# EAGLE board PCB (EAGLE 9.7.0)
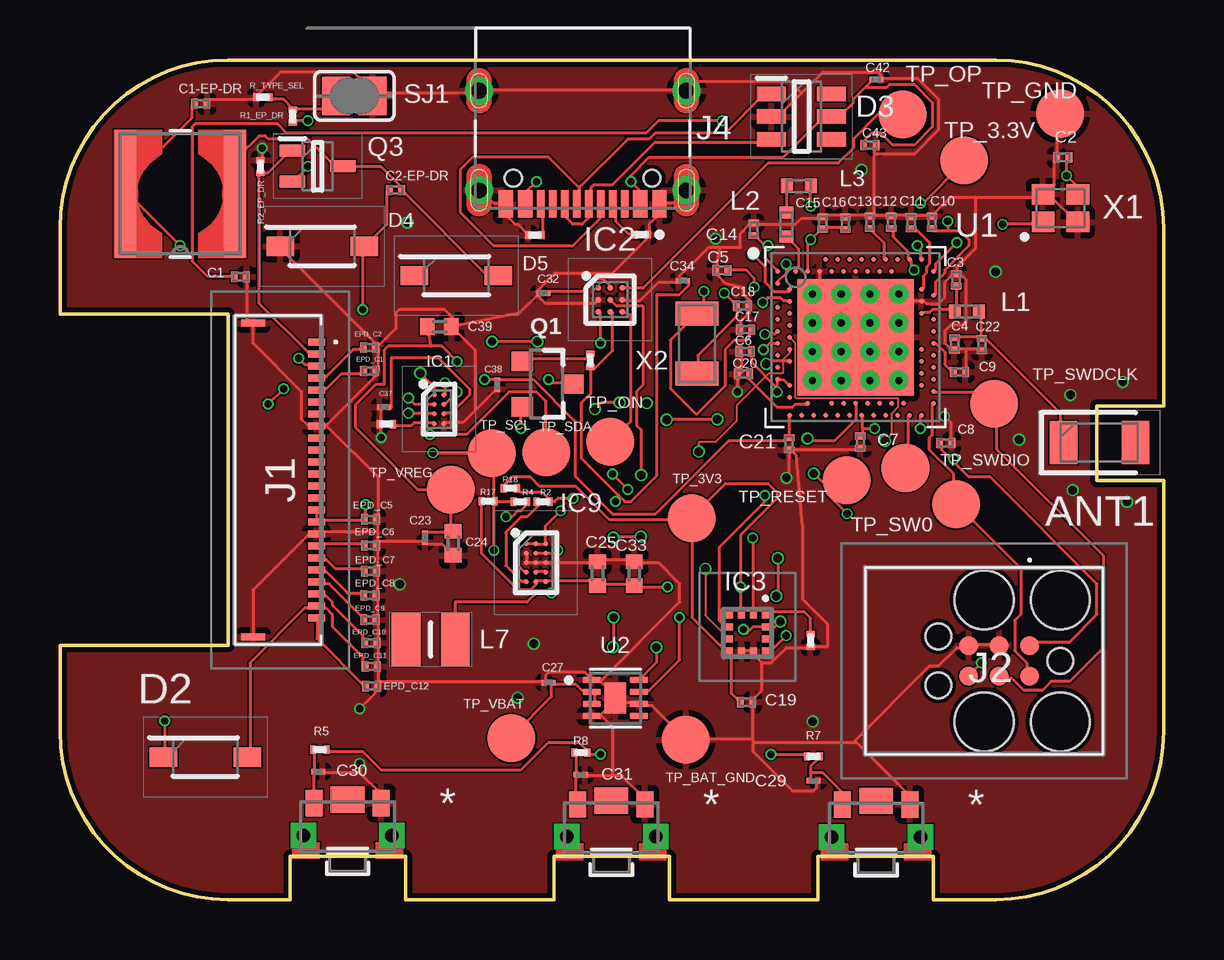
[diagram p0: board, top side]
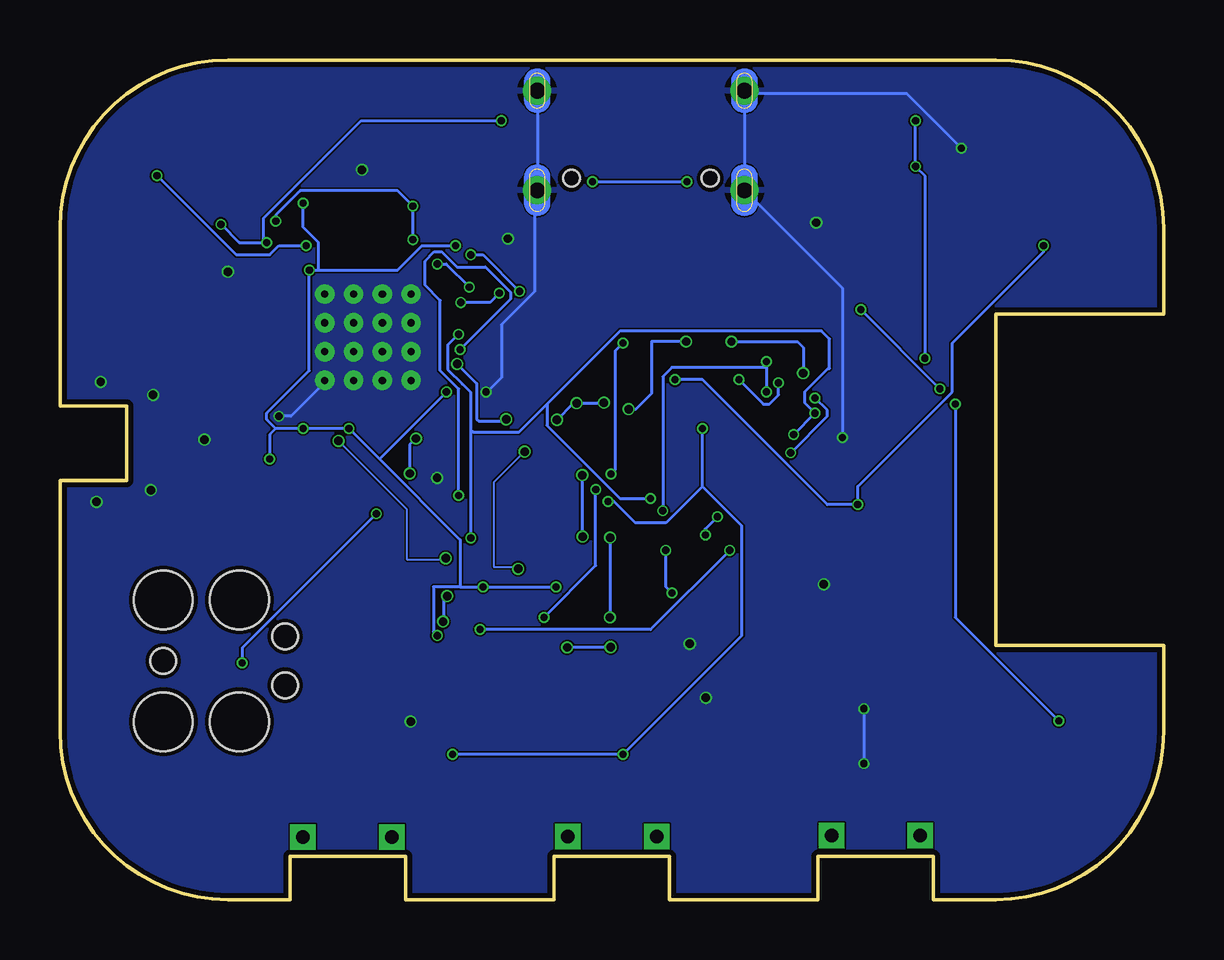
[diagram p1: board, bottom side, seen from below]

Size 46 x 35 mm. Coordinates in mm from the lower left corner, seen from the top.
Outline: 39,0 36.4,0 36.4,1.8 31.6,1.8 31.6,0 25.4,0 25.4,1.8 20.6,1.8 20.6,0 14.4,0 14.4,1.8 9.6,1.8 9.6,0 7,0 arc-90 0,7 0,10.6 7,10.6 7,24.4 0,24.4 0,28 arc-90 7,35 39,35 arc-90 46,28 46,20.58 43.21,20.58 43.21,17.47 46,17.47 46,7 arc-90 39,0
Copper layers (1*16): Top 0.035mm / dielectric 1.6mm / Bottom 0.035mm
Design rules "jlcpcb-2layers.dru": minimum track width 5mil, minimum drill 0.3mm, track to track 0.07mm, track to pad 0.07mm, pad to pad 5mil, via to via 5mil, smd to smd 5mil, copper to edge 0.2mm, drill to drill 6mil, minimum pad ring 10mil, minimum via ring 3mil, stop-mask expansion 4mil, vias tented up to drill 0mil, thermal gap 10mil

## Footprints (pad centres in the part's own frame; a part is rotated, then mirrored left to right if it is on the bottom)
2450AT18B100E_ANTC3216X140N = smd 1.15 x 1.8: 1 -1.5,0; 2 1.5,0
NORDIC_NRF_3_RESC0201_L = smd 0.28 x 0.43: 1 -0.255,0; 2 0.255,0
GRM011R60J152KE01L_2_CAPC0201X13N = smd 0.22 x 0.23: 1 -0.185,0; 2 0.185,0
PERFECT_0402_0402 = smd 0.6 x 0.7: 1 -0.5,0; 2 0.5,0
ESP32_C6_LIBRARY_5_SOD3716X135N = smd 1.15 x 0.8: 1 -1.75,0; 2 1.75,0
ESP32_C6_LIBRARY_3_SOT95P280X145-6N = smd 1.2 x 0.6: 1 -1.25,0.95; 2 -1.25,0; 3 -1.25,-0.95; 4 1.25,-0.95; 5 1.25,0; 6 1.25,0.95
BQ25180YBGR_BGA8C40P2X4_100X155X50 = smd 0.2 x 0.2: A1 -0.2,0.6; A2 0.2,0.6; B1 -0.2,0.2; B2 0.2,0.2; C1 -0.2,-0.2; C2 0.2,-0.2; D1 -0.2,-0.6; D2 0.2,-0.6
DRV2605YZFR_BGA9C50P3X3_144X144X62 = smd 0.25 x 0.25: A1 -0.5,0.5; A2 0,0.5; A3 0.5,0.5; B1 -0.5,0; B2 0,0; B3 0.5,0; C1 -0.5,-0.5; C2 0,-0.5; C3 0.5,-0.5
BMA423_BMA423 = smd 0.3 x 0.35: 1 -0.75,-0.775; 2 -0.25,-0.775; 3 0.25,-0.775; 4 0.75,-0.775; 7 0.75,0.775; 8 0.25,0.775; 9 -0.25,0.775; 10 -0.75,0.775 | smd 0.35 x 0.3: 5 0.775,-0.25; 6 0.775,0.25; 11 -0.775,0.25; 12 -0.775,-0.25
RT6160AWSC_BGA15C40P3X5_140X230X60 = smd 0.216 x 0.216: A1 -0.4,0.8; A2 0,0.8; A3 0.4,0.8; B1 -0.4,0.4; B2 0,0.4; B3 0.4,0.4; C1 -0.4,0; C2 0,0; C3 0.4,0; D1 -0.4,-0.4; D2 0,-0.4; D3 0.4,-0.4; E1 -0.4,-0.8; E2 0,-0.8; E3 0.4,-0.8
503480-2400_5034802400 = smd 0.3 x 0.7: 1 -5.75,1.525; 2 -5.25,1.525; 3 -4.75,1.525; 4 -4.25,1.525; 5 -3.75,1.525; 6 -3.25,1.525; 7 -2.75,1.525; 8 -2.25,1.525; 9 -1.75,1.525; 10 -1.25,1.525; 11 -0.75,1.525; 12 -0.25,1.525; 13 0.25,1.525; 14 0.75,1.525; 15 1.25,1.525; 16 1.75,1.525; 17 2.25,1.525; 18 2.75,1.525; 19 3.25,1.525; 20 3.75,1.525; 21 4.25,1.525; 22 4.75,1.525; 23 5.25,1.525; 24 5.75,1.525 | smd 0.3 x 1: MP1 -6.54,-1.125; MP2 6.54,-1.125
TC2030-IDC_TC2030IDC = smd 0.783 x 0.783: 1 -0.953,-0.635; 2 -0.953,0.635; 3 0.317,-0.635; 4 0.317,0.635; 5 1.588,-0.635; 6 1.588,0.635 | hole 2.451: -2.223,-2.54; -2.223,2.54; 0.952,-2.54; 0.952,2.54 | hole 1.067: -2.223,0; 2.857,-1.016; 2.857,1.016
KH-TYPE-C-16P_KINGHELM_KH-TYPE-C-16P = smd 0.6 x 1.15: A1_B12 -3.2,4.725; A4_B9 -2.4,4.725; A9_B4 2.4,4.725; A12_B1 3.2,4.725 | smd 0.3 x 1.15: A5 -1.25,4.725; A6 -0.25,4.725; A7 0.25,4.725; A8 1.25,4.725; B5 1.75,4.725; B6 0.75,4.725; B7 -0.75,4.725; B8 -1.75,4.725 | drill 0.65 pad 1.05: SH1 -4.32,0; SH2 4.32,0; SH3 -4.32,4.15; SH4 4.32,4.15 | hole 0.7: -2.89,3.65; 2.89,3.65
NORDIC_NRF_2_RESC0402_L = smd 0.5 x 0.6: 1 -0.5,0; 2 0.5,0
ESP32_C6_LIBRARY_2_IND_4828-WE-TPC_WRE = smd 0.9 x 5.3: 1 -2.286,0; 2 2.286,0
MLP2016SR47MT0S1_INDC2016X100N = smd 1.2 x 2.2: 1 -1.028,0; 2 1.028,0
ESP32_C6_LIBRARY_4_ESP32_C6_LIBRARY_4_ESP32_C6_LIBRARY_4_ESP32_C6_LIBRARY_4_ESP32_WROVER_SPARKFUN-DISCRETESEMI_SOT23-3 = smd 0.8 x 0.9: 1 -0.95,-1; 2 0.95,-1; 3 0,1.1
ESP32_C6_LIBRARY_6_SOT65P210X110-3N = smd 1.05 x 0.5: 1 -1.05,0.65; 2 -1.05,-0.65; 3 1.05,0
CPF0201D7K68C1_0201 = smd 0.35 x 0.25: 1 0,0.275; 2 0,-0.275
ERA-1AEB3401C_0201 = smd 0.35 x 0.25: 1 0,0.275; 2 0,-0.275
ESP32_C6_LIBRARY_7_JUMPER_SJ = smd 1.168 x 1.6: 1 -0.762,0; 2 0.762,0
2025-10-22_07-23-44_LIBRARY_SW_EVP-AKE31A_PAN = smd 0.711 x 1.092: 1 -1.4,-0.972; 2 1.4,-0.972 | drill 0.559 pad 0.914 square: 3 -1.848,0.381; 4 1.848,0.381 | smd 1.397 x 1.092: 5 0,-1.124
HECTOR_WATCH_1_TP20R = smd 2 x 2: TP 0,0
NORDIC_NRF_4_AQFN50P700X700X85_HS-74N = smd 4.85 x 4.85: P$74 0,0 | drill 0.3 pad 0.6: P$75 -1.8,1.8; P$76 -0.6,1.8; P$77 0.6,1.8; P$78 1.8,1.8; P$79 -1.8,0.6; P$80 -0.6,0.6; P$81 0.6,0.6; P$82 1.8,0.6; P$83 -1.8,-0.6; P$84 -0.6,-0.6; P$85 0.6,-0.6; P$86 1.8,-0.6; P$87 -1.8,-1.8; P$88 -0.6,-1.8; P$89 0.6,-1.8; P$90 1.8,-1.8 | smd 0.2 x 0.2: P$A8 -1.25,3.25; P$A10 -0.75,3.25; P$A12 -0.25,3.25; P$A14 0.25,3.25; P$A16 0.75,3.25; P$A18 1.25,3.25; P$A20 1.75,3.25; P$A22 2.25,3.25; P$A23 2.75,3.25; P$AA24 3.25,-2.25; P$AB2 -2.75,-2.5; P$AC5 -2,-2.75; P$AC9 -1,-2.75; P$AC11 -0.5,-2.75; P$AC13 0,-2.75; P$AC15 0.5,-2.75; P$AC17 1,-2.75; P$AC19 1.5,-2.75; P$AC21 2,-2.75; P$AC24 3.25,-2.75; P$AD2 -2.75,-3.25; P$AD4 -2.25,-3.25; P$AD6 -1.75,-3.25; P$AD8 -1.25,-3.25; P$AD10 -0.75,-3.25; P$AD12 -0.25,-3.25; P$AD14 0.25,-3.25; P$AD16 0.75,-3.25; P$AD18 1.25,-3.25; P$AD20 1.75,-3.25; P$AD22 2.25,-3.25; P$AD23 2.75,-3.25; P$B1 -3.25,2.75; P$B3 -2.5,2.75; P$B5 -2,2.75; P$B7 -1.5,2.75; P$B9 -1,2.75; P$B11 -0.5,2.75; P$B13 0,2.75; P$B15 0.5,2.75; P$B17 1,2.75; P$B19 1.5,2.75; P$B24 3.25,2.75; P$C1 -3.25,2.25; P$D2 -2.75,2; P$D23 2.75,2; P$E24 3.25,1.75; P$F2 -2.75,1.5; P$F23 2.75,1.5; P$G1 -3.25,1.25; P$H2 -2.75,1; P$H23 2.75,1; P$J1 -3.25,0.75; P$J24 3.25,0.75; P$K2 -2.75,0.5; P$L1 -3.25,0.25; P$L24 3.25,0.25; P$M2 -2.75,0; P$N1 -3.25,-0.25; P$N24 3.25,-0.25; P$P2 -2.75,-0.5; P$P23 2.75,-0.5; P$R1 -3.25,-0.75; P$R24 3.25,-0.75; P$T2 -2.75,-1; P$T23 2.75,-1; P$U1 -3.25,-1.25; P$U24 3.25,-1.25; P$V23 2.75,-1.5; P$W1 -3.25,-1.75; P$W24 3.25,-1.75; P$Y2 -2.75,-2; P$Y23 2.75,-2
ESP32_C6_LIBRARY_SON50P200X200X80-9N = smd 0.76 x 0.27: 1 -0.985,0.75; 2 -0.985,0.25; 3 -0.985,-0.25; 4 -0.985,-0.75; 5 0.985,-0.75; 6 0.985,-0.25; 7 0.985,0.25; 8 0.985,0.75 | smd 0.9 x 1.3: 9 0,0
NORDIC_NRF_BT-XTAL_2016_N = smd 0.95 x 0.85: 1 -0.725,-0.575; 2 0.725,-0.575; 3 0.725,0.575; 4 -0.725,0.575
NORDIC_NRF_1_XTAL_3215_N = smd 1 x 1.8: 1 -1.25,0; 2 1.25,0

## Placement (x,y rotation side)
ANT1  2450AT18B100E  [2450AT18B100E_ANTC3216X140N]  43.33,19.05 0 top
C1  12pF  [NORDIC_NRF_3_RESC0201_L]  7.52,25.96 0 top
C1-EP-DR  10uF  [NORDIC_NRF_3_RESC0201_L]  5.87,33.18 0 top
C2  12pF  [NORDIC_NRF_3_RESC0201_L]  41.8,30.94 0 top
C2-EP-DR  4.7uF/25V  [NORDIC_NRF_3_RESC0201_L]  13.98,29.57 0 top
C3  1pF  [NORDIC_NRF_3_RESC0201_L]  37.35,25.83 90 top
C4  1pF  [NORDIC_NRF_3_RESC0201_L]  37.29,23.16 270 top
C5  100nF  [NORDIC_NRF_3_RESC0201_L]  27.59,26.23 180 top
C6  4.7µF  [NORDIC_NRF_3_RESC0201_L]  28.56,22.85 180 top
C7  100nF  [NORDIC_NRF_3_RESC0201_L]  33.36,19.07 270 top
C8  100nF  [NORDIC_NRF_3_RESC0201_L]  36.92,19.03 0 top
C9  820pF N.C.  [NORDIC_NRF_3_RESC0201_L]  37.49,21.99 0 top
C10  N.C.  [NORDIC_NRF_3_RESC0201_L]  36.34,28.23 90 top
C11  100pF  [NORDIC_NRF_3_RESC0201_L]  35.48,28.21 90 top
C12  100nF  [NORDIC_NRF_3_RESC0201_L]  34.65,28.24 90 top
C13  N.C.  [NORDIC_NRF_3_RESC0201_L]  33.76,28.23 90 top
C14  4.7µF  [NORDIC_NRF_3_RESC0201_L]  28.92,27.94 90 top
C15  1.0µF  [NORDIC_NRF_3_RESC0201_L]  31.79,28.2 90 top
C16  47nF  [NORDIC_NRF_3_RESC0201_L]  32.74,28.19 90 top
C17  12pF  [NORDIC_NRF_3_RESC0201_L]  28.58,23.76 0 top
C18  12pF  [NORDIC_NRF_3_RESC0201_L]  28.45,24.75 180 top
C19  100nF  [NORDIC_NRF_3_RESC0201_L]  28.62,8.23 0 top
C20  4.7µF  [NORDIC_NRF_3_RESC0201_L]  28.49,21.91 180 top
C21  4.7µF  [NORDIC_NRF_3_RESC0201_L]  30.39,19 270 top
C22  N.C.  [NORDIC_NRF_3_RESC0201_L]  38.43,23.13 270 top
C23  0.1uF  [GRM011R60J152KE01L_2_CAPC0201X13N]  15.21,15.08 90 top
C24  10uF  [PERFECT_0402_0402]  16.39,14.85 90 top
C25  22uF  [PERFECT_0402_0402]  22.4,13.59 90 top
C27  0.1uF  [GRM011R60J152KE01L_2_CAPC0201X13N]  20.36,9.05 0 top
C29  1uF  [GRM011R60J152KE01L_2_CAPC0201X13N]  31.41,4.95 180 top
C30  1uF  [GRM011R60J152KE01L_2_CAPC0201X13N]  10.76,5.34 180 top
C31  1uF  [GRM011R60J152KE01L_2_CAPC0201X13N]  21.71,5.2 180 top
C32  1uF  [GRM011R60J152KE01L_2_CAPC0201X13N]  20.15,25.27 0 top
C33  22uF  [PERFECT_0402_0402]  23.94,13.58 90 top
C34  0.1uF  [GRM011R60J152KE01L_2_CAPC0201X13N]  25.97,25.8 0 top
C37  1uF  [GRM011R60J152KE01L_2_CAPC0201X13N]  13.51,20.53 0 top
C38  1uF  [GRM011R60J152KE01L_2_CAPC0201X13N]  18.22,21.46 90 top
C39  10uF  [PERFECT_0402_0402]  15.82,23.88 0 top
C42  0.1uF  [GRM011R60J152KE01L_2_CAPC0201X13N]  34.03,34.18 0 top
C43  4.7uF  [NORDIC_NRF_3_RESC0201_L]  33.76,31.45 0 top
D2  MBR0530  [ESP32_C6_LIBRARY_5_SOD3716X135N]  6.06,5.94 0 top
D3  USBLC6-2SC6Y  [ESP32_C6_LIBRARY_3_SOT95P280X145-6N]  30.91,32.64 0 top
D4  MBR0530  [ESP32_C6_LIBRARY_5_SOD3716X135N]  10.93,27.23 0 top
D5  MBR0530  [ESP32_C6_LIBRARY_5_SOD3716X135N]  16.52,26.01 0 top
EPD_C1  1uF/50V  [NORDIC_NRF_3_RESC0201_L]  12.91,22.03 180 top
EPD_C2  1uF/50V  [NORDIC_NRF_3_RESC0201_L]  12.9,23.01 180 top
EPD_C5  0.1uF/50V  [NORDIC_NRF_3_RESC0201_L]  12.94,15.85 180 top
EPD_C6  1uF/50V  [NORDIC_NRF_3_RESC0201_L]  12.94,14.76 180 top
EPD_C7  1uF/50V  [NORDIC_NRF_3_RESC0201_L]  12.94,13.69 180 top
EPD_C8  1uF/50V  [NORDIC_NRF_3_RESC0201_L]  12.92,12.68 180 top
EPD_C9  1uF/50V  [NORDIC_NRF_3_RESC0201_L]  12.92,11.66 180 top
EPD_C10  1uF/50V  [NORDIC_NRF_3_RESC0201_L]  12.96,10.7 180 top
EPD_C11  1uF/50V  [NORDIC_NRF_3_RESC0201_L]  12.97,9.72 180 top
EPD_C12  1uF/50V  [NORDIC_NRF_3_RESC0201_L]  12.99,8.9 180 top
IC1  BQ25180YBGR  [BQ25180YBGR_BGA8C40P2X4_100X155X50]  15.8,20.44 0 top
IC2  DRV2605YZFR  [DRV2605YZFR_BGA9C50P3X3_144X144X62]  22.93,25.01 0 top
IC3  BMA421  [BMA423_BMA423]  28.66,11.11 180 top
IC9  RT6160AWSC  [RT6160AWSC_BGA15C40P3X5_140X230X60]  19.84,14.04 0 top
J1  503480-2400  [503480-2400_5034802400]  9.17,17.49 270 top
J2  TC2030-IDC  [TC2030-IDC_TC2030IDC]  39.47,9.95 180 top
J4  KH-TYPE-C-16P  [KH-TYPE-C-16P_KINGHELM_KH-TYPE-C-16P]  21.79,33.72 180 top
L1  3.9nH  [NORDIC_NRF_2_RESC0402_L]  37.8,24.51 0 top
L2  10µH  [NORDIC_NRF_2_RESC0402_L]  30.28,28.13 90 top
L3  15nH  [NORDIC_NRF_2_RESC0402_L]  30.81,29.75 0 top
L5  68uH  [ESP32_C6_LIBRARY_2_IND_4828-WE-TPC_WRE]  5.02,29.42 180 top
L7  FTC252012SR47MBCA  [MLP2016SR47MT0S1_INDC2016X100N]  15.45,10.85 180 top
Q1  20V/4.2A/52mΩ/1.4W  [ESP32_C6_LIBRARY_4_ESP32_C6_LIBRARY_4_ESP32_C6_LIBRARY_4_ESP32_C6_LIBRARY_4_ESP32_WROVER_SPARKFUN-DISCRETESEMI_SOT23-3]  20.28,21.49 270 top
Q3  SI1308EDL-T1-GE3  [ESP32_C6_LIBRARY_6_SOT65P210X110-3N]  10.74,30.57 0 top
R1_EP_DR  0.47  [CPF0201D7K68C1_0201]  9.7,32.65 0 top
R1_USB  5K1  [ERA-1AEB3401C_0201]  24.24,27.72 270 top
R2  0  [CPF0201D7K68C1_0201]  20.14,16.58 90 top
R2_EP_DR  10K  [CPF0201D7K68C1_0201]  8.36,30.55 0 top
R2_USB  5K1  [ERA-1AEB3401C_0201]  19.79,27.7 270 top
R3  0  [CPF0201D7K68C1_0201]  31.29,10.8 0 top
R4  0  [CPF0201D7K68C1_0201]  19.19,16.59 270 top
R5  10K  [ERA-1AEB3401C_0201]  10.83,6.25 90 top
R7  10K  [ERA-1AEB3401C_0201]  31.4,5.97 270 top
R8  10K  [ERA-1AEB3401C_0201]  21.72,6.13 90 top
R9  10K  [CPF0201D7K68C1_0201]  13.6,19.82 90 top
R17  3K3  [CPF0201D7K68C1_0201]  17.84,16.6 90 top
R18  3K3  [CPF0201D7K68C1_0201]  18.77,17.15 90 top
R_PWR_EPD  10K  [CPF0201D7K68C1_0201]  22.11,22.48 0 top
R_TYPE_SEL  2.2  [CPF0201D7K68C1_0201]  8.46,33.45 90 top
SJ1  [ESP32_C6_LIBRARY_7_JUMPER_SJ]  12.27,33.5 180 top
SW_DN  2025-10-22_07-23-44_LIBRARY_EVP-AKE31ASW_EVP-AKE31A_PAN  [2025-10-22_07-23-44_LIBRARY_SW_EVP-AKE31A_PAN]  34.02,2.99 180 top
SW_ENT  2025-10-22_07-23-44_LIBRARY_EVP-AKE31ASW_EVP-AKE31A_PAN  [2025-10-22_07-23-44_LIBRARY_SW_EVP-AKE31A_PAN]  22.98,3 180 top
SW_UP  2025-10-22_07-23-44_LIBRARY_EVP-AKE31ASW_EVP-AKE31A_PAN  [2025-10-22_07-23-44_LIBRARY_SW_EVP-AKE31A_PAN]  11.99,3.05 180 top
TP_3.3V  HECTOR_WATCH_1_TPTP20R  [HECTOR_WATCH_1_TP20R]  37.69,30.81 0 top
TP_3V3  HECTOR_WATCH_1_TPTP20R  [HECTOR_WATCH_1_TP20R]  26.33,15.9 0 top
TP_BAT_GND  HECTOR_WATCH_1_TPTP20R  [HECTOR_WATCH_1_TP20R]  26.09,6.66 0 top
TP_GND  HECTOR_WATCH_1_TPTP20R  [HECTOR_WATCH_1_TP20R]  41.68,32.76 0 top
TP_ON  HECTOR_WATCH_1_TPTP20R  [HECTOR_WATCH_1_TP20R]  22.93,19.09 0 top
TP_OP  HECTOR_WATCH_1_TPTP20R  [HECTOR_WATCH_1_TP20R]  35.13,32.73 0 top
TP_RESET  HECTOR_WATCH_1_TPTP20R  [HECTOR_WATCH_1_TP20R]  32.8,17.48 0 top
TP_SCL  HECTOR_WATCH_1_TPTP20R  [HECTOR_WATCH_1_TP20R]  17.99,18.61 0 top
TP_SDA  HECTOR_WATCH_1_TPTP20R  [HECTOR_WATCH_1_TP20R]  20.27,18.64 0 top
TP_SW0  HECTOR_WATCH_1_TPTP20R  [HECTOR_WATCH_1_TP20R]  35.24,17.99 0 top
TP_SWDCLK  HECTOR_WATCH_1_TPTP20R  [HECTOR_WATCH_1_TP20R]  38.94,20.67 0 top
TP_SWDIO  HECTOR_WATCH_1_TPTP20R  [HECTOR_WATCH_1_TP20R]  37.35,16.48 0 top
TP_VBAT  HECTOR_WATCH_1_TPTP20R  [HECTOR_WATCH_1_TP20R]  18.82,6.72 0 top
TP_VREG  HECTOR_WATCH_1_TPTP20R  [HECTOR_WATCH_1_TP20R]  16.29,17.09 0 top
U1  NRF52840 _QF  [NORDIC_NRF_4_AQFN50P700X700X85_HS-74N]  33.16,23.44 0 top
U2  MAX17048G+T10  [ESP32_C6_LIBRARY_SON50P200X200X80-9N]  23.15,8.4 0 top
X1  32MHz  [NORDIC_NRF_BT-XTAL_2016_N]  41.7,28.82 0 top
X2  32.768kHz  [NORDIC_NRF_1_XTAL_3215_N]  26.55,23.18 90 top

## Library data of the parts
ANT1 = InkTime_v5; ARROW_PART_NUMBER: 2450AT18B100E; ARROW_PRICE-STOCK: https://www.arrow.com/en/products/2450at18b100e/johanson-dielectrics?utm_currency=USD&region=nac; DESCRIPTION: Antennas 2.45GHz ANTENNA; HEIGHT: 1.4mm; MANUFACTURER_NAME: JOHANSON TECHNOLOGY; MANUFACTURER_PART_NUMBER: 2450AT18B100E; MOUSER_PART_NUMBER: 609-2450AT18B100E; MOUSER_PRICE-STOCK: https://www.mouser.co.uk/ProductDetail/Johanson-Technology/2450AT18B100E?qs=yCnrNFeXz%252Bh5MFsFIXGZGA%3D%3D
C1 C1-EP-DR C2 C2-EP-DR C3-C22 C24 C25 C33 C39 C43 EPD_C1 EPD_C2 EPD_C5-EPD_C12 L1-L3 R1_EP_DR R1_USB R2 R2_EP_DR R2_USB R3-R5 R7-R9 R17 R18 R_PWR_EPD R_TYPE_SEL SJ1 TP_3.3V TP_3V3 TP_BAT_GND TP_GND TP_ON TP_OP TP_RESET TP_SCL TP_SDA TP_SW0 TP_SWDCLK TP_SWDIO TP_VBAT TP_VREG X1 X2 = InkTime_v5
C23 C27 C29-C32 C34 C37 C38 C42 = InkTime_v5; AVAILABILITY: In Stock; CHECK_PRICES: https://www.snapeda.com/parts/GRM011R60J152KE01L/Murata/view-part/?ref=eda; DESCRIPTION: SMD Capacitor X5R(EIA) with Capacitance: 1500pF Tol. 10%. Rated Voltage: 6.3Vdc; MF: Murata; MP: GRM011R60J152KE01L; PACKAGE: 0201 Murata; PRICE: None; SNAPEDA_LINK: https://www.snapeda.com/parts/GRM011R60J152KE01L/Murata/view-part/?ref=snap
D2 D4 D5 = InkTime_v5; AVAILABILITY: In Stock; CHECK_PRICES: https://www.snapeda.com/parts/MBR0530/Onsemi/view-part/?ref=eda; DESCRIPTION: Diode Schottky 30 V 500mA Surface Mount SOD-123; MF: ON Semiconductor; MP: MBR0530; PACKAGE: SOD-123-2 ON Semiconductor; PRICE: None; PURCHASE-URL: https://www.snapeda.com/api/url_track_click_mouser/?unipart_id=179458&manufacturer=ON Semiconductor&part_name=MBR0530&search_term=None; SNAPEDA_LINK: https://www.snapeda.com/parts/MBR0530/Onsemi/view-part/?ref=snap
D3 = InkTime_v5; AVAILABILITY: In Stock; CHECK_PRICES: https://www.snapeda.com/parts/USBLC6-2SC6Y/STMicroelectronics/view-part/?ref=eda; DESCRIPTION: 17V Clamp 5A (8/20µs) Ipp Tvs Diode Surface Mount SOT-23-6; MF: STMicroelectronics; MP: USBLC6-2SC6Y; PACKAGE: SOT-23-6 STMicroelectronics; PRICE: None; SNAPEDA_LINK: https://www.snapeda.com/parts/USBLC6-2SC6Y/STMicroelectronics/view-part/?ref=snap
IC1 = InkTime_v5; ARROW_PART_NUMBER: BQ25180YBGR; ARROW_PRICE-STOCK: https://www.arrow.com/en/products/bq25180ybgr/texas-instruments?utm_currency=USD&region=nac; DESCRIPTION: Charger IC Lithium Ion/Polymer, Lithium Iron Phosphate 8-DSBGA (1.6x1.1); HEIGHT: 0.5mm; MANUFACTURER_NAME: Texas Instruments; MANUFACTURER_PART_NUMBER: BQ25180YBGR; MOUSER_PART_NUMBER: 595-BQ25180YBGR; MOUSER_PRICE-STOCK: https://www.mouser.co.uk/ProductDetail/Texas-Instruments/BQ25180YBGR?qs=doiCPypUmgEWjAK%252BJAX6Tw%3D%3D
IC2 = InkTime_v5; ARROW_PART_NUMBER: DRV2605YZFR; ARROW_PRICE-STOCK: https://www.arrow.com/en/products/drv2605yzfr/texas-instruments?region=nac; DESCRIPTION: Haptic Driver for ERM/LRA with Built-In Library and Smart Loop Architecture; HEIGHT: 0.625mm; MANUFACTURER_NAME: Texas Instruments; MANUFACTURER_PART_NUMBER: DRV2605YZFR
IC3 = InkTime_v5; ARROW_PART_NUMBER: BMA423; ARROW_PRICE-STOCK: https://www.arrow.com/en/products/bma423/bosch; DESCRIPTION: Accelerometers Triaxial low-g 12bit Acceleration Sensor; HEIGHT: 1mm; MANUFACTURER_NAME: BOSCH; MANUFACTURER_PART_NUMBER: BMA423; MOUSER_PART_NUMBER: 262-BMA423; MOUSER_PRICE-STOCK: https://www.mouser.co.uk/ProductDetail/Bosch-Sensortec/BMA423?qs=HXFqYaX1Q2xC%252BSgeGoX3mg%3D%3D
IC9 = InkTime_v5; DESCRIPTION: Buck-Boost Regulator Positive Output Step-Up/Step-Down I2C DC-DC Controller IC 15-WL-CSP (BSC) (1.4x2.3); HEIGHT: 0.6mm; MANUFACTURER_NAME: RICHTEK; MANUFACTURER_PART_NUMBER: RT6160AWSC; MOUSER_PART_NUMBER: 835-RT6160AWSC; MOUSER_PRICE-STOCK: https://www.mouser.co.uk/ProductDetail/Richtek/RT6160AWSC?qs=amGC7iS6iy%2FLd9PSoixZXQ%3D%3D
J1 = InkTime_v5; DESCRIPTION: FFC & FPC Connectors 0.5mm FPC RA SMT Dual Contact 24Ckt; HEIGHT: 1.87mm; MANUFACTURER_NAME: Molex; MANUFACTURER_PART_NUMBER: 503480-2400; MOUSER_PART_NUMBER: 538-503480-2400; MOUSER_PRICE-STOCK: https://www.mouser.co.uk/ProductDetail/Molex/503480-2400?qs=OAhjpuo3Vu7efIoxFh9AOw%3D%3D
J2 = InkTime_v5; DESCRIPTION: CABLE ADAPTER 6 POS; HEIGHT: 19mm; MANUFACTURER_NAME: Tag Connect; MANUFACTURER_PART_NUMBER: TC2030-IDC
J4 = InkTime_v5; AVAILABILITY: Not in stock; CHECK_PRICES: https://www.snapeda.com/parts/KH-TYPE-C-16P/Kinghelm/view-part/?ref=eda; MF: kinghelm; MP: KH-TYPE-C-16P; PACKAGE: None; PRICE: None; SNAPEDA_LINK: https://www.snapeda.com/parts/KH-TYPE-C-16P/Kinghelm/view-part/?ref=snap
L5 = InkTime_v5; COPYRIGHT: Copyright (C) 2024 Ultra Librarian. All rights reserved.; MANUFACTURER_PART_NUMBER: 744043680; MFR_NAME: Wurth Electronics
L7 = InkTime_v5; DESCRIPTION: SMD / SMT Inductors (Coils), L=0.47?H, L x W x T :; HEIGHT: 1mm; JLCPCB: https://jlcpcb.com/partdetail/6763488-FTC252012SR47MBCA/C5832368; MANUFACTURER_NAME: TDK; MANUFACTURER_PART_NUMBER: FTC252012SR47MBCA
Q1 = InkTime_v5; PROD_ID: TRAN-14388
Q3 = InkTime_v5; AVAILABILITY: In Stock; CHECK_PRICES: https://www.snapeda.com/parts/SI1308EDL-T1-GE3/Vishay+Siliconix/view-part/?ref=eda; DESCRIPTION: Si1308EDL-T1-GE3 N-channel MOSFET Transistor, 1.5 A, 30 V, 3-Pin SC-70 | Siliconix / Vishay SI1308EDL-T1-GE3; MF: Vishay Siliconix; MP: SI1308EDL-T1-GE3; PACKAGE: SOT-323 Vishay Semiconductor; PRICE: None; PURCHASE-URL: https://www.snapeda.com/api/url_track_click_mouser/?unipart_id=274603&manufacturer=Vishay Siliconix&part_name=SI1308EDL-T1-GE3&search_term=None; SNAPEDA_LINK: https://www.snapeda.com/parts/SI1308EDL-T1-GE3/Vishay+Siliconix/view-part/?ref=snap
SW_DN SW_ENT SW_UP = InkTime_v5; COPYRIGHT: Copyright (C) 2025 Ultra Librarian. All rights reserved.; DIGI-KEY_PART_NUMBER_1: P123437TR-ND; DIGI-KEY_PART_NUMBER_2: P123437CT-ND; DIGI-KEY_PART_NUMBER_3: P123437DKR-ND; MANUFACTURER_NAME: Panasonic; MANUFACTURER_PART_NUMBER: EVP-AKE31A
U1 = InkTime_v5; U1: NRF52840 _QF
U2 = InkTime_v5; AVAILABILITY: In Stock; CHECK_PRICES: https://www.snapeda.com/parts/MAX17048G+T10/Analog+Devices/view-part/?ref=eda; DESCRIPTION: 3µA 1-Cell/2-Cell Fuel Gauge with ModelGauge; MF: Analog Devices; MP: MAX17048G+T10; PACKAGE: TDFN-8 Maxim; PRICE: None; PURCHASE-URL: https://www.snapeda.com/api/url_track_click_mouser/?unipart_id=329239&manufacturer=Analog Devices&part_name=MAX17048G+T10&search_term=None; SNAPEDA_LINK: https://www.snapeda.com/parts/MAX17048G+T10/Analog+Devices/view-part/?ref=snap

## Nets
3V3/1.7D: C34.2 IC2.C2 Q1.2 R5.2 R7.2 R8.2 R_PWR_EPD.2
3V3/2.4A: C6.1 C7.1 C8.1 C12.1 C14.1 C19.1 C25.1 C33.1 IC3.3 IC3.7 IC3.10 IC9.E2 IC9.E3 J2.1 R17.1 R18.1 TP_3.3V.TP TP_3V3.TP U1.P$A22 U1.P$AD14 U1.P$AD23 U1.P$B1 U1.P$W1 U1.P$Y2
ALERT/1.6C: U2.5
ALERT/2.5C: U1.P$J24
D+/1.5D: D3.4
D+/2.7D: U1.P$AD6
D-/1.5D: D3.6
D-/2.7D: U1.P$AD4
DN: D3.1 J4.A7 J4.B7
DP: D3.3 J4.A6 J4.B6
EPD_3V3: C1-EP-DR.1 EPD_C5.2 J1.15 J1.16 L5.2 Q1.3
EPD_BUSY/1.5D: J1.9
EPD_BUSY/2.2D: U1.P$AD12
EPD_CS/1.4C: J1.12
EPD_CS/2.2D: U1.P$K2
EPD_DC/1.5D: J1.11
EPD_DC/2.2D: U1.P$AD10
EPD_RST/1.5D: J1.10
EPD_RST/2.2D: U1.P$AC11
GDR: J1.2 Q3.1 R2_EP_DR.2
GND: C1-EP-DR.2 C1.2 C2.1 C3.2 C4.2 C5.2 C6.2 C7.2 C8.2 C9.2 C10.2 C11.2 C12.2 C13.2 C14.2 C15.2 C16.2 C17.1 C18.1 C19.2 C20.2 C21.2 C22.2 C23.1 C24.1 C25.2 C27.1 C29.1 C30.1 C31.1 C32.1 C33.2 C34.1 C37.1 C38.1 C39.2 C42.2 C43.2 D3.2 D4.1 EPD_C1.1 EPD_C2.1 EPD_C5.1 EPD_C6.1 EPD_C7.1 EPD_C8.1 EPD_C9.1 EPD_C10.1 EPD_C11.1 EPD_C12.1 IC1.D2 IC2.B1 IC2.B3 IC3.8 IC3.9 IC9.B1 IC9.C1 IC9.C2 IC9.C3 J1.8 J1.17 J1.MP1 J1.MP2 J2.3 J2.5 J4.A1_B12 J4.A12_B1 J4.SH1 J4.SH2 J4.SH3 J4.SH4 R1_USB.1 R2_EP_DR.1 R2_USB.2 R3.2 R9.1 R_TYPE_SEL.1 SJ1.1 SW_DN.1 SW_ENT.1 SW_UP.1 TP_BAT_GND.TP TP_GND.TP U1.P$74 U1.P$75 U1.P$76 U1.P$77 U1.P$78 U1.P$79 U1.P$80 U1.P$81 U1.P$82 U1.P$83 U1.P$84 U1.P$85 U1.P$86 U1.P$87 U1.P$88 U1.P$89 U1.P$90 U1.P$B7 U1.P$F23 U2.1 U2.4 U2.6 U2.9 X1.2 X1.4
HAPTIC_EN/1.4C: IC2.A1
HAPTIC_EN/2.6A: U1.P$U1
IMU_INT1: IC3.5 U1.P$N1
IMU_INT2: IC3.6 U1.P$P2
LX1: IC9.B2 IC9.B3 L7.1
LX2: L7.2
MOSI/1.5B: J1.14
MOSI/2.2D: U1.P$B13
N$1: IC1.D1 R9.2
N$2: L2.1 U1.P$B3
N$3: IC3.1 R3.1
N$4: L2.2 L3.1
N$5: C10.1 C15.1 C16.1 L3.2 U1.P$B5 U1.P$E24
N$6: C13.1 U1.P$A18
N$7: C5.1 U1.P$C1
N$8: IC9.E1 R2.1
N$9: C17.2 U1.P$D2 X2.2
N$10: IC9.D2 IC9.D3
N$11: IC9.D1 R4.1
N$12: C18.2 U1.P$F2 X2.1
N$13: C20.1 U1.P$AC5
N$14: C9.1 U1.P$N24
N$15: C3.1 L1.1 U1.P$H23
N$16: ANT1.1 C4.1 C22.1 L1.2
N$17: C11.1 U1.P$D23
N$18: C1.1 U1.P$B24 X1.1
N$19: C2.2 U1.P$A23 X1.3
N$20: C2-EP-DR.1 D2.1 D4.2
N$21: C2-EP-DR.2 D5.2 L5.1 Q3.3
N$22: D5.1
N$24: R1_EP_DR.1 R_TYPE_SEL.2 SJ1.2
N$25: C32.2 IC2.A2
N$26: J4.A5 R1_USB.2
N$27: J4.B5 R2_USB.1
N$28: EPD_C2.2 J1.4
N$29: EPD_C1.2 J1.5
N$30: EPD_C6.2 J1.18
N$31: EPD_C7.2 J1.19
N$32: EPD_C8.2 J1.20
N$33: EPD_C10.2 J1.22
N$34: EPD_C12.2 J1.24
OUT+: IC2.A3 TP_OP.TP
OUT-: IC2.C3 TP_ON.TP
P0.04: U1.P$J1
P0.09: U1.P$L24
P0.13/1.5D: C30.2 R5.1 SW_UP.2
P0.13/2.6C: U1.P$AD8
P0.14/1.5D: C31.2 R8.1 SW_ENT.2
P0.14/2.7C: U1.P$AC9
P0.19: U1.P$AC15
P0.20: U1.P$AD16
P0.21: U1.P$AC17
P0.22: U1.P$AD18
P0.23: U1.P$AC19
P0.24: U1.P$AD20
P0.25: U1.P$AC21
P0.26: U1.P$G1
P0.27: U1.P$H2
P0.28: U1.P$B11
P0.29: U1.P$A10
P0.30: U1.P$B9
P0.31: U1.P$A8
P1.01/1.6C: Q1.1 R_PWR_EPD.1
P1.01/2.4B: U1.P$Y23
P1.02/1.6C: C29.2 R7.1 SW_DN.2
P1.02/2.8C: U1.P$W24
P1.03: U1.P$V23
P1.04: U1.P$U24
P1.05: U1.P$T23
P1.06: U1.P$R24
P1.07: U1.P$P23
P1.09: U1.P$R1
P1.10: U1.P$A20
P1.11: U1.P$B19
P1.12: U1.P$B17
P1.13: U1.P$A16
P1.14: U1.P$B15
P1.15: U1.P$A14
PMIC_INT: IC1.A1 U1.P$T2
PREVGH: EPD_C9.2 J1.21
PREVGL: D2.2 EPD_C11.2 J1.23
RESE: J1.3 Q3.2 R1_EP_DR.2
RESET: J2.6 TP_RESET.TP U1.P$AC13
SCK/1.5B: J1.13
SCK/2.2D: U1.P$A12
SCL/1.4C: IC2.C1 U2.7
SCL/2.4C: IC1.B1 IC3.12 R4.2 R17.2 TP_SCL.TP U1.P$M2
SDA/1.4C: IC2.B2 U2.8
SDA/2.4C: IC1.C1 IC3.2 R2.2 R18.2 TP_SDA.TP U1.P$L1
SWDCLK: J2.4 TP_SWDCLK.TP U1.P$AA24
SWDIO: J2.2 TP_SWDIO.TP U1.P$AC24
SWO: TP_SW0.TP U1.P$AD22
VBAT/1.2A: C27.2 TP_VBAT.TP U2.2 U2.3
VBAT/2.5C: C37.2 IC1.C2
VBUS/1.5D: C42.1 C43.1 D3.5 J4.A4_B9 J4.A9_B4
VBUS/2.6D: C21.1 C38.2 IC1.A2 U1.P$AD2
VREG: C23.2 C24.2 C39.1 IC1.B2 IC9.A1 IC9.A2 IC9.A3 TP_VREG.TP

## Tracks (layer width: path | path; a pad name or v marks a point on that pad's centre or on a via)
3V3/1.7D  (via drill 0.3)
  Top 0.127: 23.29,16.85 21.73,18.4 21.73,20.7 22.11,21.08 R_PWR_EPD.2 22.27,22.11 23.03,22.88 23.03,24.46 IC2.C2 | 23.29,16.85 23.54,16.59 23.8,16.59 24.88,17.67 24.88,25.23 25.83,25.23 26.21,25.61 26.21,25.73 C34.2 | R5.2 11.22,6.18 12.62,6.18 13.38,5.41 19.22,5.41 20.37,6.56 21.64,6.56 21.89,6.3 21.89,6.18 R8.2 22.02,6.05 v22.53,6.05 | v29.64,6.05 31.04,6.05 R7.2 | v19.22,19.64 19.22,20.53 Q1.2 | 23.29,16.85 23.29,16.72 v23.16,16.59
  Bottom 0.127: v29.64,6.05 v22.53,6.05 17.57,11 17.57,15.57 19.22,17.23 | 19.22,17.23 v19.22,19.64 | v23.16,16.59 22.91,16.59 22.02,15.7 20.75,15.7 19.22,17.23
3V3/2.4A  (via drill 0.3)
  Top 0.127: C19.1 28.24,8.34 27.99,8.59 27.99,10.24 IC3.7 27.86,10.37 27.73,10.37 26.34,11.76 26.34,15.83 TP_3V3.TP | IC3.3 28.37,11.89 v28.37,13.04 28.37,15.19 29.89,16.72 29.89,16.97 29.51,17.35 27.73,17.35 26.34,15.96 TP_3V3.TP | R18.1 18.59,17.23 18.59,17.35 18.84,17.61 19.61,17.61 19.99,17.23 21.51,17.23 22.91,15.83 26.21,15.83 TP_3V3.TP | 37.26,18.24 37.89,17.61 38.78,17.61 43.23,13.16 43.23,11.89 42.08,10.75 40.56,10.75 40.43,10.62 J2.1 | 37.26,18.24 36.75,18.75 36.75,19 C8.1 | 20.24,13.29 19.86,13.29 IC9.E2 19.86,13.16 19.61,12.91 19.1,12.91 17.57,14.43 R17.1 | 20.24,13.29 22.27,13.29 22.4,13.16 C25.1 22.53,13.16 23.92,13.16 C33.1 24.05,13.04 v25.32,13.04 | 20.24,13.29 IC9.E3 | 29.89,21.67 30.15,21.67 30.4,21.42 U1.P$Y2 | 29.38,27.26 29.38,26.75 29.89,26.24 U1.P$B1 | 29.38,27.26 29,27.64 C14.1 | C12.1 34.72,27.89 34.72,27.64 35.35,27 35.35,26.75 U1.P$A22 35.48,26.62 35.48,26.37 v35.61,26.24 | 33.45,19.64 33.45,19.39 C7.1 | 33.45,19.64 33.45,20.15 U1.P$AD14 | v35.86,19.64 35.86,20.15 U1.P$AD23 | 33.45,19.64 v33.96,19.64 | v30.27,11 29.64,10.37 29.51,10.37 IC3.10 | v29.51,27.26 29.38,27.26 | 29.89,21.67 U1.P$W1 | v35.86,29.04 35.99,29.04 37.64,30.69 TP_3.3V.TP | v37.26,18.37 37.26,18.24 | 29.89,21.33 28.82,22.41 C6.1 | 29.89,21.67 29.89,21.33 | 29.89,21.33 v29.89,21.16
  Bottom 0.127: 29.31,13.04 29.31,15 32.69,18.37 | v30.27,11 30.43,11.16 30.43,13.04 29.31,13.04 | 32.69,18.37 v33.96,19.64 v35.86,19.64 37,19.64 | 37,19.64 37.39,20.02 37.39,20.27 35.61,22.05 v35.61,26.24 35.23,26.24 | v29.51,27.26 30.91,27.26 31.92,26.24 35.23,26.24 | 32.69,18.37 v29.89,21.16 | v35.86,29.04 35.86,28.02 35.23,27.39 35.23,26.24 | 29.31,13.04 v28.37,13.04 v25.32,13.04 | v37.26,18.37 37.26,19.39 37,19.64
DN
  Top 0.127: 21.64,29.67 21.64,29.04 J4.A7 | 21.64,29.67 23.67,31.7 24.56,31.7 24.81,31.96 27.73,31.96 29.26,33.48 29.64,33.48 D3.1 | 21.64,29.67 20.37,30.94 17.19,30.94 16.68,30.43 16.68,28.66 18.08,27.26 21.38,27.26 22.53,28.4 22.53,28.91 J4.B7
DP
  Top 0.127: J4.B6 21.13,28.91 21.13,28.4 21.38,28.15 21.76,28.15 22.02,28.4 22.02,28.91 J4.A6 22.15,29.04 22.15,29.67 22.27,29.8 23.03,29.8 24.81,31.58 29.64,31.58 D3.3
EPD_3V3  (via drill 0.3)
  Top 0.127: C1-EP-DR.1 5.51,33.1 5.51,32.59 2.84,29.93 2.84,29.54 L5.2 2.84,29.42 v5,27.26 | 10.71,15.83 12.62,15.83 EPD_C5.2 12.75,15.96 v12.75,16.46 | 10.71,15.83 10.71,16.21 J1.15 | 10.71,15.83 J1.16 | v20.37,21.67 20.49,21.54 21.26,21.54 Q1.3
  Bottom 0.127: v20.37,21.67 19.22,21.67 14.02,16.46 v12.75,16.46 12.75,17.23 8.81,21.16 8.81,23.19 5,27 v5,27.26
GDR
  Top 0.127: Q3.1 9.57,31.2 8.68,30.31 8.43,30.31 R2_EP_DR.2 8.3,30.18 8.3,24.85 10.33,22.81 10.59,22.81 J1.2
GND  (via drill 0.3, 0.35)
  Top 0.127: 19.48,14.05 19.48,14.43 IC9.B1 | 19.48,14.05 19.86,14.05 | 19.48,14.05 IC9.C1 | 19.86,14.05 IC9.C3 | 19.86,14.05 IC9.C2 | IC9.C3 22.4,14.05 C25.2 22.53,14.18 23.92,14.18 C33.2 24.05,14.05 24.94,14.05 25.83,13.16 25.83,12.4 22.53,9.1 | IC9.C3 | 23.03,5.16 23.42,5.16 24.3,4.27 24.3,4.07 SW_ENT.1 | 23.03,5.16 21.89,5.16 C31.1 | U2.1 22.15,9.22 21.89,9.48 20.37,9.48 20.24,9.35 20.24,9.1 C27.1 20.11,9.1 13.26,9.1 | 22.53,7.7 22.27,7.7 U2.4 22.53,7.7 | 23.03,8.21 23.16,8.34 U2.9 | 23.03,8.21 22.53,7.7 | 23.03,8.21 24.05,8.21 U2.6 24.18,8.08 24.69,8.08 26.08,6.68 TP_BAT_GND.TP 26.21,6.68 28.88,6.68 | 23.03,8.21 U2.9 | 22.53,9.1 22.27,9.1 U2.1 | 22.53,9.1 23.16,8.46 U2.9 | 23.03,5.16 23.03,7.19 22.53,7.7 | 22.53,9.1 U2.1 | C21.2 33.32,18.75 C7.2 | IC3.8 28.5,10.37 28.88,10.37 IC3.9 28.88,10.24 29.26,9.86 | 29.26,9.86 29.64,9.86 30.27,10.49 31.28,10.49 R3.2 31.97,10.52 32,10.55 32,11.47 30.94,12.53 30.94,15.61 30.71,18.51 30.47,18.75 C21.2 | J2.3 39.04,10.62 37.89,10.62 J2.5 37.77,10.49 37.39,10.49 36.62,9.73 36.24,9.73 33.07,6.56 | 28.88,6.68 28.88,8.21 C19.2 28.88,8.34 29.26,8.72 29.26,9.86 | 28.88,6.68 28.88,6.56 | 28.88,6.56 28.88,6.18 30.53,4.53 31.42,4.53 31.54,4.65 31.54,4.91 C29.1 | 28.88,6.56 33.07,6.56 | 33.07,6.56 33.19,6.56 35.35,4.4 35.35,4.02 SW_DN.1 | v36.88,20.15 37.13,19.89 37.13,19.13 C8.2 | 37.77,22.94 38.4,22.94 C22.2 | 37.77,22.94 37.39,22.94 C4.2 37.26,22.94 37.13,22.94 36.88,23.19 36.88,23.7 37.13,23.96 37.64,23.96 37.77,24.08 37.77,25.86 37.64,25.99 37.39,25.99 C3.2 | 37.77,22.94 37.77,22.05 C9.2 | 31.42,25.35 31.67,25.61 31.67,26.12 U1.P$B7 | 34.97,25.23 35.23,24.97 35.86,24.97 U1.P$F23 35.99,24.97 36.12,24.85 36.62,24.85 36.88,25.1 36.88,25.73 37.13,25.99 37.26,25.99 C3.2
  Top 0.127: 31.42,22.81 31.42,21.67 U1.P$87 | 31.42,22.81 U1.P$83 | 31.42,22.81 U1.P$74 | 32.05,24.72 31.42,24.08 U1.P$79 | 31.42,25.35 U1.P$75 | 31.42,25.35 U1.P$74 | 33.7,21.67 32.69,21.67 U1.P$88 | U1.P$84 32.56,22.94 32.56,23.19 U1.P$74 | U1.P$80 32.56,24.08 U1.P$74 | 33.7,21.67 U1.P$89 33.83,21.67 34.84,21.67 U1.P$90 | 33.7,21.67 U1.P$74 | U1.P$85 33.7,22.81 33.45,22.56 U1.P$74 | 34.97,23.96 34.97,22.94 U1.P$86 | U1.P$81 33.83,24.08 U1.P$74 | 34.97,23.96 U1.P$82 | 34.97,23.96 U1.P$74 | 32.05,24.72 32.56,25.23 U1.P$76 | 32.05,24.72 U1.P$74 | U1.P$77 33.83,25.23 34.34,24.72 34.46,24.72 U1.P$74 | 34.97,25.23 U1.P$78 | 34.97,25.23 U1.P$74 | X1.4 41.07,29.42 41.45,29.8 41.45,30.82 C2.1 41.58,30.94 41.58,32.72 TP_GND.TP | X1.2 42.34,28.28 41.32,29.29 41.07,29.29 X1.4 | 35.48,28.53 34.72,28.53 C12.2 34.59,28.53 33.83,28.53 | 35.48,28.53 36.24,28.53 C10.2 36.37,28.53 37.13,29.29 38.15,29.29 | 35.48,28.53 C11.2 | 33.96,31.07 33.96,28.66 33.83,28.53 | 33.96,31.07 33.96,31.45 C43.2 | 33.83,28.53 C13.2 33.7,28.53 32.81,28.53 C16.2 32.69,28.53 31.8,28.53 C15.2 31.67,28.4 30.91,28.4 30.65,28.15 29,28.15 C14.2 28.88,28.15 28.75,28.15 28.37,27.77 28.37,27.19 27.49,27.19 | IC2.B3 23.54,24.97 24.18,24.97 24.94,25.73 25.7,25.73 C34.1 25.83,25.86 25.83,25.99 27.03,27.19 27.49,27.19 | C17.1 28.37,23.83 28.37,24.08 28.75,24.46 28.75,24.74 C18.1 28.79,24.93 28.5,25.23 28.5,25.51 27.74,25.68 27.34,26.09 C5.2 27.49,27.19 | 38.15,29.29 40.94,29.29 X1.4 | 38.15,29.29 38.15,27.13 37.39,26.37 37.39,26.12 C3.2 | C1-EP-DR.2 6.14,33.23 6.27,33.36 8.18,33.36 R_TYPE_SEL.1 8.3,33.48 8.3,33.61 9.19,34.5 12.24,34.5 13.13,33.61
  Top 0.127: v8.43,31.32 8.43,30.94 R2_EP_DR.1 | 13.13,33.61 17.45,33.61 J4.SH2 17.57,33.74 26.08,33.74 J4.SH1 26.21,33.74 26.59,34.12 30.4,34.12 30.91,33.61 | 13.13,33.61 SJ1.1 | R2_USB.2 19.48,27.77 19.1,28.15 18.97,28.15 18.72,28.4 18.72,28.91 J4.A12_B1 18.59,29.04 18.08,29.04 17.57,29.54 J4.SH4 | C37.1 13.38,20.53 13.38,19.89 R9.1 13.38,19.77 v13.38,19.26 | 34.21,34.24 34.21,34.37 34.08,34.5 31.8,34.5 30.91,33.61 | 30.91,33.61 30.02,32.72 29.77,32.72 D3.2 | C6.2 28.41,22.75 28.41,21.98 C20.2 28.24,21.89 v28.24,21.16 | J4.SH3 26.08,29.54 25.57,29.04 25.07,29.04 J4.A1_B12 24.94,28.91 24.94,28.53 24.56,28.15 24.56,27.77 R1_USB.1 24.43,27.64 24.43,27.51 23.03,26.12 20.62,26.12 19.86,25.35 C32.1 | 12.49,5.29 10.97,5.29 C30.1 | 12.49,5.29 13.38,4.4 13.38,4.14 SW_UP.1 | C24.1 16.3,14.43 15.92,14.81 15.29,14.81 C23.1 15.16,14.94 13.26,14.94 | 13.26,9.1 13.26,9.61 EPD_C11.1 13.26,9.73 13.26,10.62 EPD_C10.1 13.26,10.75 13.26,11.64 EPD_C9.1 13.26,11.76 13.26,12.65 EPD_C8.1 13.26,12.78 13.26,13.67 EPD_C7.1 13.26,13.8 13.26,14.69 EPD_C6.1 | 13.26,9.1 13.26,8.97 EPD_C12.1 | 13.26,14.94 13.26,14.81 EPD_C6.1 | 13.26,14.94 13.26,15.32 | 13.26,15.32 13.26,15.83 EPD_C5.1 13.26,15.96 13.26,17.61 11.1,19.77 | 13.26,15.32 10.71,15.32 J1.17 10.59,15.19 10.33,15.19 8.05,12.91 8.05,11 J1.MP2 | 13.26,14.94 EPD_C6.1 | v12.49,5.67 12.49,5.29 | v12.49,7.95 13.13,8.59 13.13,8.84 EPD_C12.1 | C32.1 19.99,25.23 19.99,25.1 20.24,24.85 22.27,24.85 22.4,24.97 IC2.B1 | 17.3,20.38 18.21,21.29 C38.1 | 17.3,20.38 16.81,19.89 16.05,19.89 IC1.D2 | C39.2 17.3,22.9 17.3,20.38 | C32.1 19.14,24.44 C39.2 | C1.2 7.79,25.86 7.79,24.21 7.92,24.08 J1.MP1 8.05,23.96 8.05,23.19 10.08,21.16 10.08,20.02 10.33,19.77 10.59,19.77 J1.8 10.71,19.77 11.1,19.77
  Top 0.127: 11.1,19.77 13.26,21.93 EPD_C1.1 13.26,22.05 13.26,22.94 EPD_C2.1 13.26,23.07 | 13.26,23.07 9.19,27.13 D4.1 | 13.26,23.07 14.02,23.83 | 14.02,23.82 14.02,23.83 | C39.2 16.26,23.82 | 33.96,31.07 35.61,31.07 36.62,32.08 36.62,33.36 35.73,34.24 34.21,34.24 | 34.21,34.24 C42.2 | 13.26,9.1 EPD_C12.1 | 14.02,23.83 14.02,24.47 14.16,24.61 16.02,24.61 16.32,24.31 C39.2 | C21.2 30.39,17.69 v30.28,17.58
  Bottom 0.127: v36.88,20.15 36.37,20.15 34.97,21.54 U1.P$90 | v8.43,31.32 10.71,33.61 17.45,33.61 | v13.38,19.26 13.38,25.48 17.45,29.54 J4.SH4 17.45,29.67 17.45,33.61 | 17.45,33.61 J4.SH2 | v28.24,21.16 28.19,21.16 27.6,21.75 27.6,23.96 26.21,25.35 26.21,29.54 J4.SH3 26.08,29.67 26.08,33.61 J4.SH1 | v12.49,7.95 v12.49,5.67
  other vias: 44.3,21.58 42.12,21.04 39.98,19.17 42.21,17.07 44.48,16.58 39,26.17 27.33,27.55 33.41,30.42 19.75,10.66 14.48,28.22 14.16,13.14 31.38,7.42 19.08,8.41
  pour Top: 239 corners
  pour Bottom: 273 corners
IMU_INT1  (via drill 0.3)
  Top 0.127: v29.32,22.93 29.59,23.19 29.89,23.19 U1.P$N1 | v29.38,16.85 29.38,16.59 27.48,14.69 27.48,11.64 27.86,11.26 IC3.5
  Bottom 0.127: v29.32,22.93 27.21,25.04 27.21,25.31 28.27,26.37 29.45,26.37 30.09,27 30.4,27 30.78,26.62 30.78,25.61 30.15,24.97 30.15,22.05 29.38,21.29 v29.38,16.85
IMU_INT2  (via drill 0.35)
  Top 0.076: v26.63,18.67 26.63,19.07 27.33,19.07 28.2,19.94 28.2,20.59 29.54,21.93 30.11,21.93 30.14,21.96 30.14,22.51 30.41,22.78 U1.P$P2 | v26.9,13.79 26.9,11.85 IC3.6
  Bottom 0.076: v26.63,18.67 27.92,17.38 27.92,13.87 26.9,13.87 v26.9,13.79
LX1  (via drill 0.3)
  Top 0.127: IC9.B3 19.86,14.43 IC9.B2 | IC9.B3 20.62,14.43 v20.75,14.56 | v20.49,12.78 19.86,12.78 19.48,12.4 16.48,12.4 L7.1 | IC9.B3
  Bottom 0.127: v20.75,14.56 20.75,13.04 v20.49,12.78
N$1
  Top 0.127: IC1.D1 15.54,19.89 14.78,19.89 14.65,19.77 13.89,19.77 R9.2
N$2
  Top 0.127: U1.P$B3 30.65,26.24 30.78,26.37 30.78,27.13 30.4,27.51 L2.1
N$3
  Top 0.127: R3.1 31.29,11.73 31.04,11.98 29.51,11.98 IC3.1
N$4
  Top 0.127: L2.2 30.27,28.66 30.27,29.67 L3.1
N$5  (via drill 0.3)
  Top 0.127: 37,27.89 36.37,27.89 C10.1 | 37,27.89 37.51,27.89 37.89,27.51 37.89,27.26 36.88,26.24 36.88,26.12 36.5,25.73 36.5,25.23 U1.P$E24 | U1.P$B5 31.16,26.24 31.16,27.39 v31.29,27.51 31.67,27.89 C15.1 31.8,28.02 32.69,28.02 C16.1 | v31.29,28.91 31.29,29.67 L3.2 | v37,28.28 37,27.89
  Bottom 0.127: v31.29,27.51 v31.29,28.91 31.92,29.54 35.99,29.54 37,28.53 v37,28.28
N$6
  Top 0.127: U1.P$A18 34.34,26.75 34.34,27.39 33.83,27.89 C13.1
N$7  (via drill 0.3)
  Top 0.127: v30.27,26.5 30.27,26.12 29.89,25.73 U1.P$C1 | v28.94,25.54 28.94,25.9 28.61,26.23 C5.1
  Bottom 0.127: v30.27,26.5 29.9,26.5 v28.94,25.54
N$8
  Top 0.127: IC9.E1 19.35,13.29 19.22,13.29 18.59,13.92 18.59,15.32 19.22,15.96 19.48,15.96 19.99,16.46 R2.1
N$9  (via drill 0.3)
  Top 0.127: v28.88,26.88 29.38,26.38 29.38,25.74 29.77,25.35 30.4,25.35 U1.P$D2 | v26.84,25.35 26.84,24.72 26.58,24.46 X2.2 26.45,24.33 25.45,23.32 25.45,21.31 26.54,20.22 27.73,21.42 27.73,22.94 28.11,23.32 28.62,23.32 28.75,23.45 28.75,23.7 C17.2
  Bottom 0.127: v28.88,26.88 28.37,26.88 v26.84,25.35
N$10
  Top 0.127: IC9.D2 19.86,13.67 20.24,13.67 IC9.D3
N$11  (via drill 0.3)
  Top 0.127: v19.1,15.19 19.1,13.92 19.35,13.67 IC9.D1 | v18.59,15.96 18.84,15.96 19.1,16.21 19.22,16.21 19.48,16.46 R4.1
  Bottom 0.127: v19.1,15.19 19.1,15.45 v18.59,15.96
N$12  (via drill 0.3)
  Top 0.127: v29.29,24.89 29.5,25.1 30.02,25.1 30.15,24.97 30.4,24.97 U1.P$F2 | v27.69,25.28 28.2,24.77 C18.2 28.24,24.74 28.24,24.34 26.59,22.69 26.59,22.08 X2.1
  Bottom 0.127: v29.29,24.89 28.08,24.89 v27.69,25.28
N$13
  Top 0.127: U1.P$AC5 31.16,20.65 30.65,20.65 30.53,20.53 29.89,20.53 28.68,21.74 C20.1
N$14
  Top 0.127: U1.P$N24 36.5,23.19 36.88,22.81 36.88,22.31 37.13,22.05 C9.1
N$15
  Top 0.127: U1.P$H23 35.99,24.46 36.24,24.46 36.37,24.59 37.26,24.59 L1.1 37.39,24.59 37.39,25.48 C3.1
N$16
  Top 0.127: 38.4,23.45 37.39,23.45 C4.1 | 38.4,23.45 38.4,24.46 L1.2 | 38.4,23.45 C22.1 38.53,23.32 38.66,23.32 41.7,20.27 41.7,19.13 ANT1.1
N$17
  Top 0.127: U1.P$D23 35.99,25.48 35.99,25.99 36.12,26.12 36.12,26.37 36.24,26.5 36.24,27.39 35.73,27.89 35.48,27.89 C11.1
N$18  (via drill 0.3)
  Top 0.127: v37.39,27.39 36.5,26.5 36.5,26.24 U1.P$B24 | v39.29,28.15 40.94,28.15 X1.1 | v27.61,32.47 24.94,32.47 24.43,31.96 9.45,31.96 9.06,32.34 5.63,32.34 5.51,32.21 5.51,26.62 6.14,25.99 7.16,25.99 C1.1
  Bottom 0.127: 37.51,27.39 38.53,27.39 v39.29,28.15 | v27.61,32.47 33.45,32.47 37.51,28.4 37.51,27.39 | 37.51,27.39 v37.39,27.39
N$19  (via drill 0.3)
  Top 0.127: v35.73,27.26 35.86,27.13 35.86,26.75 U1.P$A23 | C2.2 41.96,30.82 v41.96,30.18 42.34,29.8 42.34,29.42 X1.3
  Bottom 0.127: v35.73,27.26 36.88,27.26 37.26,26.88 38.66,26.88 v41.96,30.18
N$20  (via drill 0.3)
  Top 0.127: C2-EP-DR.1 13.64,29.54 13.64,28.15 12.75,27.26 D4.2 12.62,27.13 v12.62,24.59 | v4.37,7.45 4.37,6.05 D2.1 | v9.32,21.29 v8.68,20.65
  Bottom 0.127: v4.37,7.45 8.68,11.76 v8.68,20.65 | v12.62,24.59 v9.32,21.29
N$21
  Top 0.127: D5.2 18.21,26.12 17.7,26.12 14.27,29.54 C2-EP-DR.2 14.14,29.67 14.14,29.8 13.38,30.56 11.86,30.56 Q3.3 11.73,30.69 11.35,30.69 10.33,31.7 8.68,31.7 8.56,31.83 8.3,31.83 7.41,30.94 7.41,29.54 L5.1
N$24
  Top 0.127: R_TYPE_SEL.2 8.81,33.36 9.32,33.36 9.7,32.97 R1_EP_DR.1 9.83,32.97 10.97,32.97 11.48,33.48 SJ1.2
N$25
  Top 0.127: C32.2 20.37,25.35 21.76,25.35 22.27,25.86 22.65,25.86 22.91,25.61 IC2.A2
N$26
  Top 0.127: R1_USB.2 23.92,27.77 23.67,27.77 23.16,28.28 23.16,28.91 J4.A5
N$27
  Top 0.127: R2_USB.1 20.11,27.77 20.11,28.91 J4.B5
N$28
  Top 0.127: EPD_C2.2 12.62,22.94 12.24,22.94 11.1,21.8 10.71,21.8 J1.4
N$29
  Top 0.127: EPD_C1.2 12.62,21.93 11.73,21.93 11.1,21.29 10.71,21.29 J1.5
N$30
  Top 0.127: EPD_C6.2 12.62,14.81 10.71,14.81 J1.18
N$31
  Top 0.127: EPD_C7.2 12.62,13.8 11.48,13.8 11.1,14.18 10.71,14.18 J1.19
N$32
  Top 0.127: EPD_C8.2 12.62,12.78 11.98,12.78 11.1,13.67 10.71,13.67 J1.20
N$33
  Top 0.127: EPD_C10.2 12.62,10.75 12.62,11 11.35,12.27 11.35,12.4 11.1,12.65 10.71,12.65 J1.22
N$34
  Top 0.127: EPD_C12.2 12.62,8.97 10.71,10.88 10.71,11.64 J1.24
OUT+
  Top 0.127: IC2.A3 23.54,25.48 24.3,25.48 29.51,30.69 32.43,30.69 33.07,31.32 33.07,31.7 34.08,32.72 35.1,32.72 TP_OP.TP
OUT-
  Top 0.127: TP_ON.TP 23.77,19.93 23.77,24.37 IC2.C3
P0.13/1.5D
  Top 0.127: R5.1 10.59,6.18 10.59,5.41 C30.2 10.59,5.29 10.59,4.14 SW_UP.2
P0.14/1.5D
  Top 0.127: R8.1 21.51,6.05 21.51,5.29 C31.2 21.51,5.16 21.51,4.07 SW_ENT.2
P1.01/1.6C
  Top 0.127: R_PWR_EPD.1 22,22.56 19.35,22.56 Q1.1
P1.02/1.6C
  Top 0.127: 31.29,5.29 31.29,5.54 31.67,5.92 R7.1 | 31.29,5.29 31.29,5.03 C29.2 | 31.29,5.29 31.8,5.29 32.56,4.53 32.56,4.02 SW_DN.2
PMIC_INT  (via drill 0.35)
  Top 0.127: v29.44,22.33 29.55,22.44 U1.P$T2 | v19.9,23.26 v18.01,23.26 | v15.02,21.94 15.6,21.36 IC1.A1 | v23.33,20.71 22.57,20.71 v22.3,20.44 | v27.4,20.02 25.31,20.02 v25.29,20
  Bottom 0.127: v18.01,23.26 15.26,23.26 15.02,23.02 v15.02,21.94 | v23.33,20.71 23.33,20.69 v24.46,20.69 24.6,20.69 v25.29,20 | v22.3,20.44 22,20.44 21.33,21.11 21.33,23.28 19.92,23.28 v19.9,23.26 | v29.44,22.33 28.63,21.52 28.63,20.02 28.55,19.94 27.4,19.94 v27.4,20.02
PREVGH
  Top 0.127: EPD_C9.2 12.62,11.76 11.22,13.16 10.71,13.16 J1.21
PREVGL
  Top 0.127: EPD_C11.2 12.62,9.73 12.62,10.11 11.35,11.38 11.35,11.89 11.1,12.15 10.71,12.15 J1.23 10.59,12.15 10.21,12.15 7.92,9.86 7.92,6.05 D2.2
RESE  (via drill 0.3)
  Top 0.127: v10.33,32.47 9.83,32.47 R1_EP_DR.2 | v10.33,30.56 Q3.2 | v9.95,22.56 10.21,22.31 10.59,22.31 J1.3
  Bottom 0.127: v10.33,32.47 v10.33,30.56 9.95,30.18 v9.95,22.56
RESET  (via drill 0.3, 0.35)
  Top 0.127: v38.4,9.86 37.89,9.35 J2.6 | 32.23,16.66 31.98,16.91 TP_RESET.TP | 32.23,16.66 v32.81,16.08 | U1.P$AC13 33.17,20.68 33.17,20.01 32.28,19.12 31.26,19.12 v31.16,19.22 | v31.42,17.76 32.23,16.95 32.23,16.66
  Bottom 0.127: v38.4,9.86 38.4,10.49 v32.81,16.08 | v31.16,19.22 31.42,18.96 v31.42,17.76
SCL/1.4C  (via drill 0.3)
  Top 0.127: v22.53,23.19 22.53,24.46 IC2.C1 | v23.67,17.1 v23.03,17.73 | v25.83,11.76 25.83,9.99 24.56,8.72 24.18,8.72 U2.7
  Bottom 0.127: v22.53,23.19 22.86,22.86 22.86,17.91 v23.03,17.73 | v23.67,17.1 23.67,13.92 v25.83,11.76
SCL/2.4C  (via drill 0.3, 0.35)
  Top 0.076: U1.P$M2 30.63,23.22 30.63,20.95 30.68,20.9 34.93,20.9 34.93,20.53 34.65,20.25 34.65,19.38 v34.39,19.12
  Top 0.127: v14.53,20.91 14.78,20.65 15.54,20.65 IC1.B1 | v15.54,18.62 17.95,18.62 TP_SCL.TP 18.08,18.5 18.08,16.72 R17.2 | R17.2 18.21,16.59 18.84,16.59 R4.2 | v18.08,14.56 18.08,16.59 R17.2 | 28.64,11.12 28.88,11.36 IC3.12 29.8,11.36 v30.03,11.59 | v29.92,14.23 29.92,12.71 v29.86,12.65
  Top 0.152: v28.5,11.26 28.64,11.12
  Bottom 0.076: v34.39,19.12 31.55,16.28 31.55,14.18 29.94,14.18 29.92,14.2 v29.92,14.23
  Bottom 0.127: v14.53,20.91 14.02,20.4 14.02,20.15 v15.54,18.62 | v28.5,11.26 21.38,11.26 v18.08,14.56 | v29.86,12.65 30.02,12.49 v30.02,11.59 v30.03,11.59
SDA/1.4C  (via drill 0.35)
  Top 0.127: IC2.B2 23.18,24.76 24.3,24.76 24.3,21.44 24.04,21.18 24.04,19.76 24.21,19.59 24.21,17.75 24.23,17.73 v24.23,17.69 | v24.21,15.13 24.19,15.11 23.05,15.11 23.05,15.09 v23.07,15.09 | v23.08,11.76 23.08,10.55 v23.05,10.52 | v24.86,10.51 24.86,9.88 U2.8
  Bottom 0.127: v24.23,17.69 24.23,15.15 v24.21,15.13 | v23.07,15.09 v23.07,11.77 v23.08,11.76 | v23.05,10.52 24.83,10.52 v24.85,10.5 v24.86,10.51
SDA/2.4C  (via drill 0.3)
  Top 0.127: R18.2 19.1,17.1 19.22,16.97 20.11,16.97 20.37,16.72 20.37,16.59 R2.2 20.49,16.59 20.62,16.59 20.75,16.72 v21.38,16.72 | v14.53,20.27 15.54,20.27 IC1.C1 | v15.41,19.39 16.94,19.39 18.72,21.16 19.86,21.16 20.24,20.78 20.24,18.75 TP_SDA.TP | U1.P$L1 29.79,23.56 v29.38,23.56 | v28.88,15.07 28.88,11.89 IC3.2
  Bottom 0.127: v15.41,19.39 v14.53,20.27 14.95,20.7 14.95,21.17 13.98,22.14 13.92,22.14 13.92,23.37 14.25,23.7 22.65,23.7 25.7,20.65 | v29.38,23.56 29.84,23.11 29.84,22.1 29.22,21.48 29.21,21.48 28.88,21.15 28.88,19.58 | 25.7,20.65 26.86,19.5 28.79,19.5 28.88,19.58 | 28.88,19.58 v28.88,15.07 | v21.38,16.72 22.65,16.72 25.7,19.77 25.7,20.65
SWDCLK
  Top 0.127: U1.P$AA24 36.5,21.16 38.53,21.16 38.91,20.78 TP_SWDCLK.TP 39.04,20.65 39.04,18.78 43.48,14.33 43.48,10.49 42.08,9.1 41.32,9.1 40.94,8.72 40.18,8.72 39.67,9.22 39.16,9.22 J2.4
SWDIO
  Top 0.127: U1.P$AC24 36.37,20.65 36.37,19.39 36.24,19.26 36.24,18.75 37.26,17.73 37.26,16.59 TP_SWDIO.TP 37.39,16.46 40.05,13.8 40.05,11.89 39.8,11.64 39.8,10.37 40.31,9.86 40.31,9.35 J2.2
SWO
  Top 0.127: U1.P$AD22 35.35,20.15 35.35,18.11 TP_SW0.TP
VBAT/1.2A
  Top 0.127: U2.3 22.27,8.21 22.27,8.59 U2.2 22.15,8.72 21.76,8.72 21.51,8.97 20.62,8.97 C27.2 20.49,8.97 20.49,8.46 18.84,6.81 TP_VBAT.TP
VBAT/2.5C
  Top 0.127: IC1.C2 16.05,20.27 16.3,20.27 17.07,21.04 17.07,21.29 15.75,22.6 13.83,22.6 13.83,20.53 C37.2
VBUS/1.5D  (via drill 0.3)
  Top 0.127: 33.58,33.86 33.07,33.36 33.07,33.23 32.56,32.72 32.18,32.72 D3.5 32.05,32.59 31.8,32.59 30.15,30.94 24.56,30.94 23.8,30.18 v23.8,29.93 24.18,29.54 24.18,29.04 J4.A4_B9 | 33.58,33.86 33.83,34.12 C42.1 | 33.58,33.86 34.46,33.86 34.59,33.99 35.61,33.99 36.37,33.23 36.37,32.21 35.61,31.45 34.72,31.45 34.21,31.96 33.83,31.96 33.58,31.7 33.58,31.45 C43.1 | v19.86,29.93 19.48,29.54 19.48,29.04 J4.A9_B4
  Bottom 0.127: v23.8,29.93 v19.86,29.93
VBUS/2.6D  (via drill 0.3)
  Top 0.127: U1.P$AD2 30.4,20.15 C21.1 30.27,19.13 27.88,19.13 24.83,16.08 23.03,16.08 21.47,17.65 21.47,19.93 19.73,21.67 18.21,21.67 | v16.05,21.54 16.05,21.04 IC1.A2 | 18.21,21.67 v17.7,21.67 | 18.21,21.67 C38.2
  Bottom 0.127: v16.05,21.54 16.05,21.04 16.43,20.65 16.68,20.65 v17.7,21.67
VREG  (via drill 0.3)
  Top 0.127: C23.2 15.29,15.32 16.3,15.32 C24.2 16.3,15.45 16.3,16.97 TP_VREG.TP 16.18,17.1 14.91,17.1 12.3,19.7 12.3,20.61 13.15,21.46 13.5,21.46 13.51,21.47 13.51,22.9 13.68,23.07 15.46,23.07 | 19.86,14.81 19.48,14.81 IC9.A1 | 19.86,14.81 20.24,14.81 IC9.A3 20.24,15.57 v20.88,16.21 | 19.86,14.81 IC9.A2 | v16.56,21.16 16.05,20.65 IC1.B2 | v16.56,22.43 15.92,23.07 15.46,23.07 | 15.46,23.07 C39.1
  Bottom 0.127: v16.56,22.43 16.56,22.18 | 16.56,22.18 v16.56,21.16 | v20.88,16.21 20.88,21.8 20.49,22.18 16.56,22.18

## Text on the board
tPlace: R_TYPE_SEL | R1_EP_DR | R2_EP_DR | R18 | R17 | R4 | R2 | R5 | R8 | R7